# Altium PCB HVpcb.PcbDoc
Units mm, origin at the board's own origin, x right, y up, seen from the top; angles counter-clockwise.
Board outline 63.5 x 34 mm, 2 copper layers (Top Layer, Bottom Layer); 23 components, 14 nets, 62 pads, 0 vias.
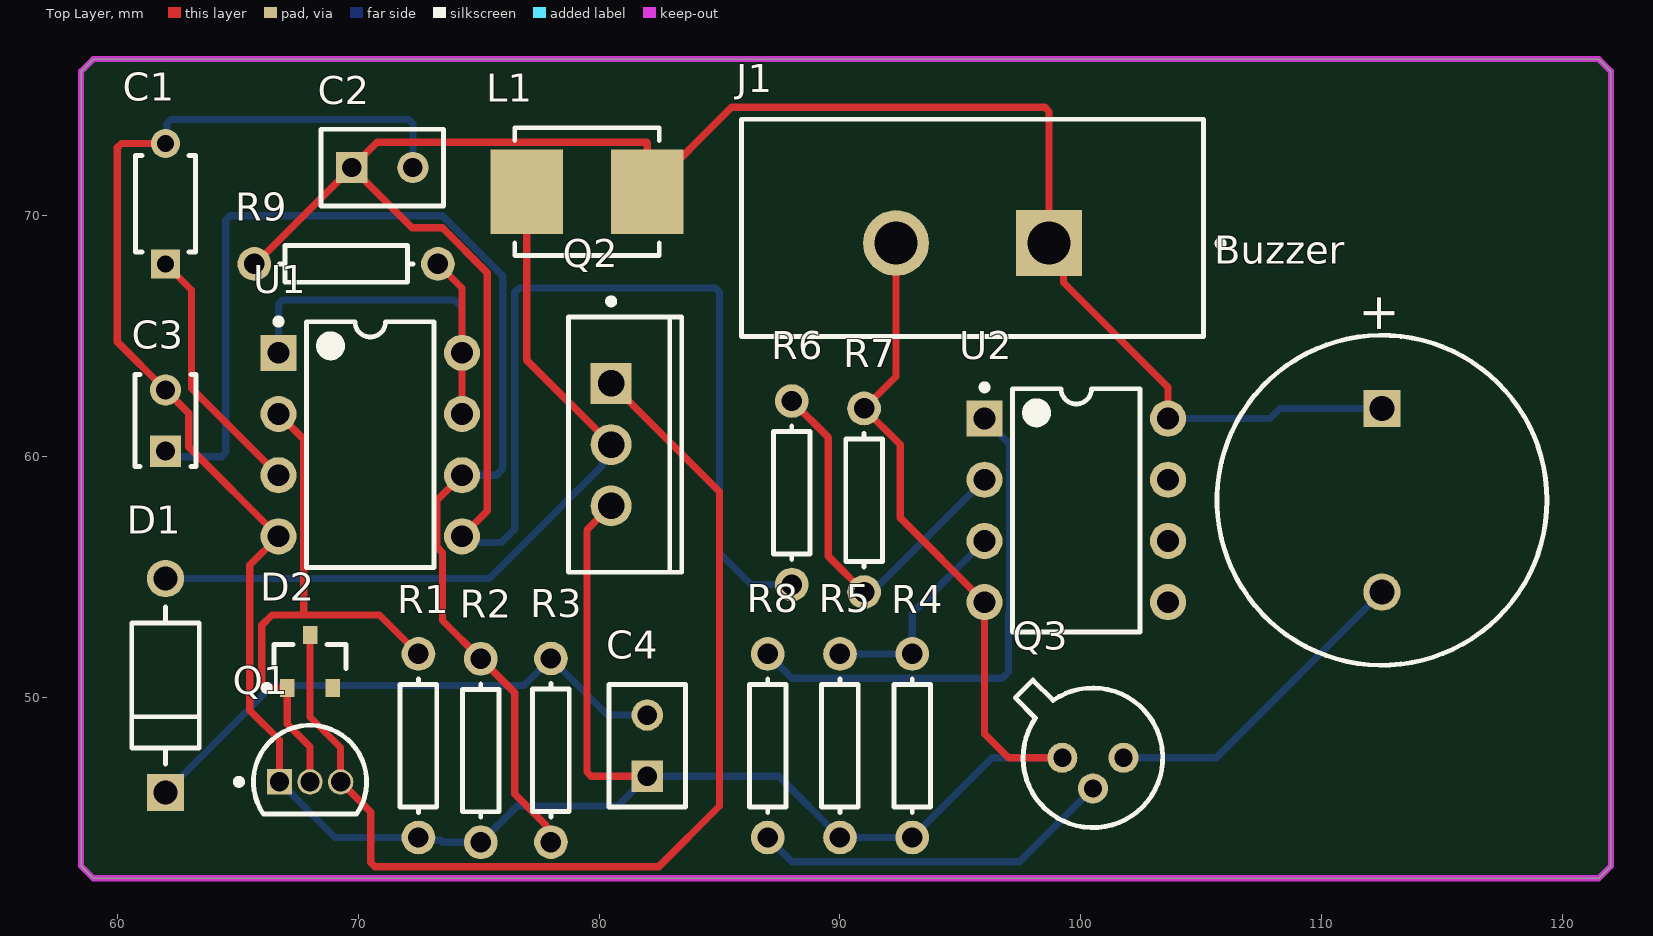
[diagram p0: Top Layer view]
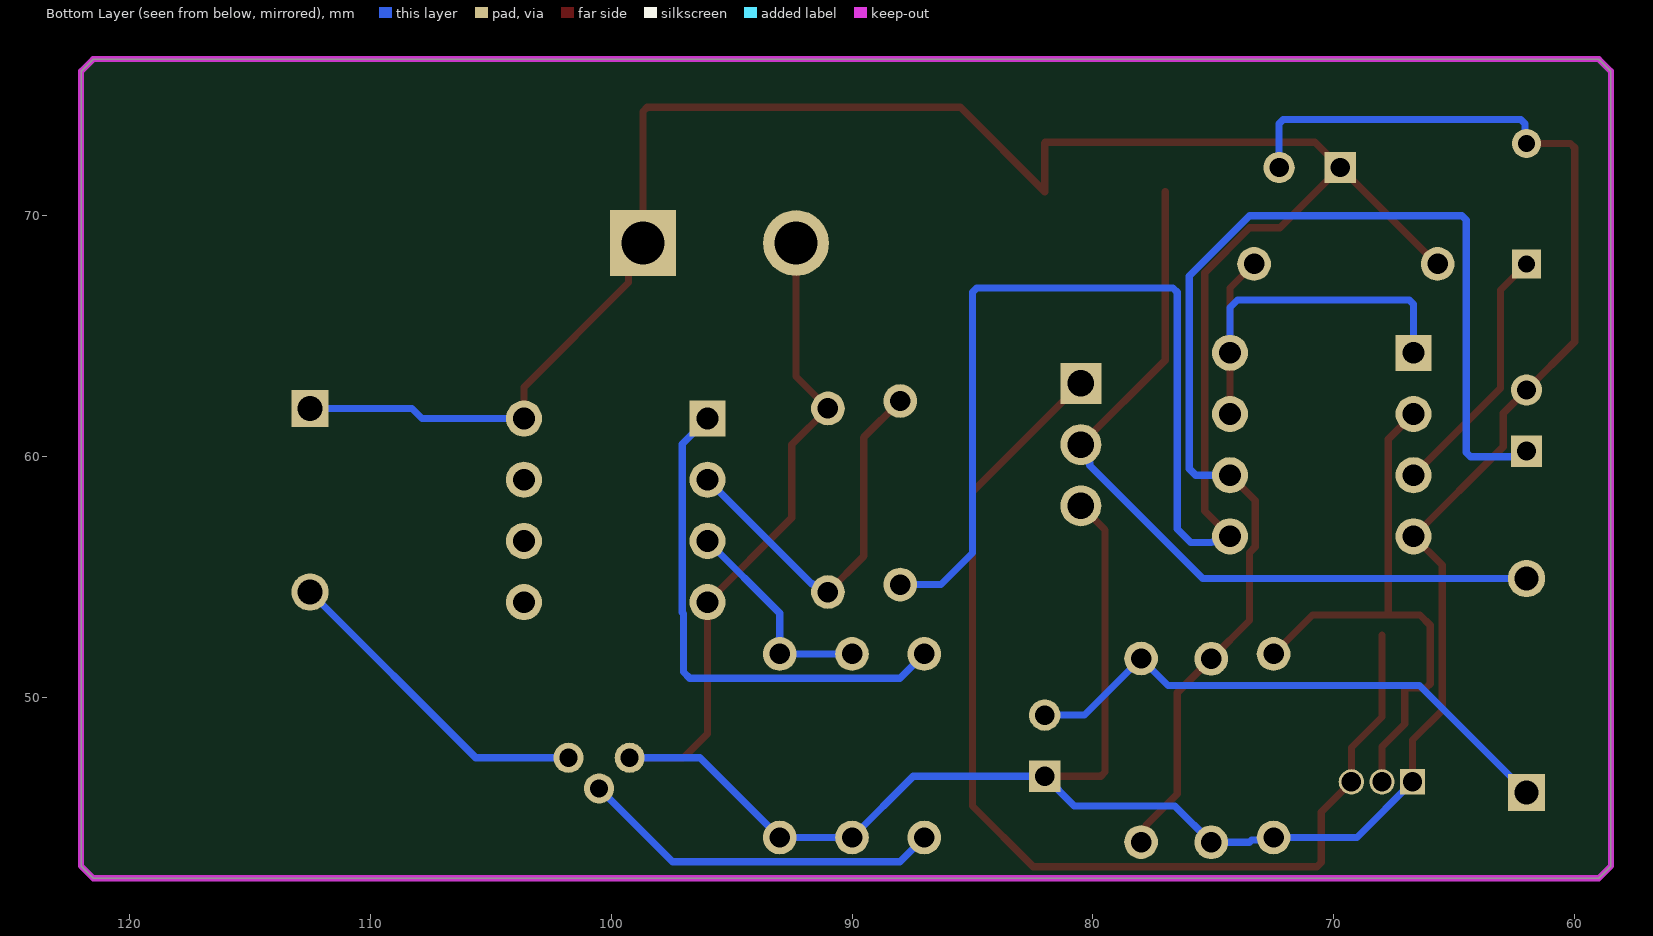
[diagram p1: Bottom Layer view, seen from below]

## Layer stack, top to bottom
Top Solder: solder mask 0.0102, Solder Resist, Dk 3.5
Top Layer: signal copper 0.0356
Dielectric 1: dielectric 0.32, FR-4, Dk 4.8
Bottom Layer: signal copper 0.0356
Bottom Solder: solder mask 0.0102, Solder Resist, Dk 3.5

## Board outline
58.5,43 58.5,76 59,76.5 121.5,76.5 122,76 122,43 121.5,42.5 59,42.5

## Design rules (kind name [scope] priority, off if disabled: settings)
Clearance [All] p1: gap=0.15 ignorepadtopadclearanceinfootprint=FALSE
PolygonConnect [All] p1: connectstyle=Relief reliefconductorwidth=0.254 reliefentries=4 polygonreliefangle="90 Angle" airgapwidth=0.254
RoutingVias [All] p1: holewidth=0.711 width=1.27 viastyle="Through Hole" minholewidth=0.711 minwidth=1.27 maxholewidth=0.711 maxwidth=1.27
SolderMaskExpansion [All] p1: expansion=0.102 istentingtop=FALSE
Width [All] p1: maxlimit=2 minlimit=0.15 preferedwidth=0.3
30 further rules are at their usual default settings.

## Components (designator, comment, footprint, x,y, rotation, side; value= is the part's Value field where it differs from the comment)
Buzzer "KPEG242" KINGS-KPEG242-2 112.5,58.19 r270 top
C1 "22nF" FP-RCE1K1-2_5-MFG 62,70.5 r90 top
C2 "0.1uF" CAPR51-254-508X318X736 71,72 r0 top
C3 "0.01uF" KEMT-C315-THT-2 62,61.5 r90 top
C4 "0.1uF" CAPR51-254-508X318X736 82,48 r90 top
D1 "1N4007" FP-1N4007-MFG 62,50.5 r90 top value=15pF
D2 "BAS40-04" INF-SOT23_L 68,51.5 r90 top
J1 "Batareika" FP-350428-1-MFG 95.5,69.5 r180 top
L1 "10mH" FP-LQH55DN_03-MFG 79.5,71 r180 top
Q1 "BC516" ONSC-TO-92-3-29-11 68,46.5 r0 top
Q2 "IRF840" VISH-TO-220AB-3 80.5,60.5 r0 top
Q3 "2N2222A" STM-TO-18-3 100.5,47.5 r0 top
R1 "Res1" AXIAL-0.3 72.5,48 r90 top value=10K
R2 "Res1" AXIAL-0.3 75.088,47.799 r90 top value=30.1K
R3 "Res1" AXIAL-0.3 78,47.81 r90 top value=10M
R4 "Res1" AXIAL-0.3 93,48 r90 top value=1K
R5 "Res1" AXIAL-0.3 90,48 r90 top value=40K
R6 "Res1" AXIAL-0.3 88,58.5 r90 top value=2K
R7 "Res1" AXIAL-0.3 91,58.19 r90 top value=1K
R8 "Res1" AXIAL-0.3 87,48 r270 top value=10K
R9 "Res1" AXIAL-0.3 69.5,68 r0 top value=22.1
U1 "MC34063AP" P0008A 70.5,60.5 r0 top
U2 "LM358N" ONSC-PDIP-8-626-05_M 99.81,57.77 r0 top

## Footprints (in the part's own frame and the unit in brackets; to place one, negate y for a bottom-side part, rotate by r counter-clockwise, add the part's x,y. Pads: shape width x height; smd on the part's side, far side on the other; paste and mask are expansions set on the pad)
AXIAL-0.3 [mm] "Axial Device, Thru-Hole; 2 Leads; 0.3 in Pin Spacing"
  round 1.4 hole 0.85: 1(-3.81,0) 2(3.81,0)
  silkscreen extent -2.77,-0.76 2.77,0.76
CAPR51-254-508X318X736 [mm] "THD, 2-Leads, Body 5.08x3.18mm"
  rect 1.3x1.3 hole 0.8: 1(-1.27,0)
  round 1.3 hole 0.8: 2(1.27,0)
  silkscreen extent -2.54,-1.59 2.54,1.59, body extent -2.54,-1.59 2.54,1.59, height 7.36
FP-1N4007-MFG [mm]
  rect 1.55x1.55 hole 1 paste-1000 mask+0: 1(-4.44,0)
  round 1.55 hole 1 paste-1000 mask+0: 2(4.44,0)
  silkscreen extent -3.26,-1.4 3.26,1.4, body extent -5.32,-1.5 5.32,1.5, height 0.25
FP-350428-1-MFG [mm]
  rect 2.73x2.73 hole 1.78 paste-1000 mask+0: 1(-3.175,0.635)
  round 2.73 hole 1.78 paste-1000 mask+0: 2(3.175,0.635)
  silkscreen extent -10.43,-4.51 9.59,4.51, body extent -9.69,-4.61 9.69,4.61, height 0.25
FP-LQH55DN_03-MFG [mm]
  rect 3x3.5 smd paste+0 mask+0: 1(-2.5,0) 2(2.5,0)
  silkscreen extent -3,-2.65 3,2.65, body extent -4.1,-2.75 4.1,2.75, height 0.25
FP-RCE1K1-2_5-MFG [mm]
  rect 1.2x1.2 hole 0.7 paste-1000 mask+0: 1(-2.5,0)
  round 1.2 hole 0.7 paste-1000 mask+0: 2(2.5,0)
  silkscreen extent -2,-1.25 2,1.25, body extent -3.2,-1.35 3.2,1.35, height 0.25
INF-SOT23_L [mm] "SOT23, 3-Leads, Body 2.9x1.3 mm, Pitch 0.95 mm, IPC High Density"
  rect 0.75x0.6 smd: 1(-1.1,0.95) 2(-1.1,-0.95) 3(1.1,0)
  silkscreen extent -1.22,-1.5 0.7,1.92, body extent -0.7,-1.5 0.7,1.5, height 1.1
KEMT-C315-THT-2 [mm] "THD, 2-Leads, Body 3.81x2.54mm"
  rect 1.3x1.3 hole 0.8: 1(-1.27,0)
  round 1.3 hole 0.8: 2(1.27,0)
  silkscreen extent -1.9,-1.27 1.91,1.27, body extent -1.91,-1.27 1.91,1.27, height 4.66
KINGS-KPEG242-2 [mm] "THD, 2-Leads, Dia 13.7mm, Pitch 7.62mm"
  rect 1.55x1.55 hole 1.05: 1(-3.81,0)
  round 1.55 hole 1.05: 2(3.81,0)
  silkscreen extent -6.85,-6.85 6.85,6.85, body extent -6.85,-6.85 6.85,6.85, height 7.6
ONSC-PDIP-8-626-05_M [mm] "DIP, 8-Leads, Body 10x7.1mm, Pitch 2.54mm"
  rect 1.5x1.5 hole 0.9: 1(-3.81,3.81)
  round 1.5 hole 0.9: 2(-3.81,1.27) 3(-3.81,-1.27) 4(-3.81,-3.81) 5(3.81,-3.81) 6(3.81,-1.27) 7(3.81,1.27) 8(3.81,3.81)
  silkscreen extent -3.93,-5.05 2.65,5.23, body extent -3.95,-5 3.95,5, height 5.33
ONSC-TO-92-3-29-11 [mm] "TO, 3-Leads, Body Dia 4.7mm, Pitch 1.27mm"
  rect 1.05x1.05 hole 0.8: 1(-1.27,0)
  round 1.05 hole 0.8: 2(0,0) 3(1.27,0)
  silkscreen extent -3.07,-1.34 2.35,2.35, body extent -2.35,-1.33 2.36,2.36, height 7.87
P0008A [mm] "DIP, 8-Leads, Body 10.15x6.6mm, Pitch 2.54mm"
  rect 1.5x1.5 hole 0.9: 1(-3.81,3.81)
  round 1.5 hole 0.9: 2(-3.81,1.27) 3(-3.81,-1.27) 4(-3.81,-3.81) 5(3.81,-3.81) 6(3.81,-1.27) 7(3.81,1.27) 8(3.81,3.81)
  silkscreen extent -3.93,-5.1 2.65,5.23, body extent -3.95,-5.07 3.95,5.07, height 5.08
STM-TO-18-3 [mm] "TO, 3-Leads, Diameter 5.8mm"
  round 1.25 hole 0.75: 1(0,-1.27) 2(1.27,0) 3(-1.27,0)
  silkscreen extent -3.23,-2.9 2.9,3.23, body extent -3.23,-2.9 2.9,3.23, height 5.3
VISH-TO-220AB-3 [mm] "FM, 3-Leads, Body 10.55x4.65mm, Pitch 2.54mm"
  rect 1.7x1.7 hole 1.1: 1(0,2.54)
  round 1.7 hole 1.1: 2(0,0) 3(0,-2.54)
  silkscreen extent -1.76,-5.3 2.93,6.07, body extent -1.74,-5.28 2.91,5.28, height 19.31

## Part data
Buzzer: library part CMP-2000-06518-1, "Piezo Indicator, 4100 Hz, 3 to 16 V, -20 to 70 degC, 2-Pin THD, RoHS", Current - Max=7A, Frequency Range=3600to4600Hz, Manufacturer=KingstateElectronicsCorp., Maximum Resonant Frequency=4600Hz, Maximum Supply Current=7mA, Operating Temperature=-20to70°C, Package Description="2-Pin Through Hole Device, Body Dia 13.7 mm, Pitch 7.62 mm", PartNumber=KPE-242, Typical Operating Supply Voltage=12Vdc, Category=AudioIndicatorsandAlerts, Datasheet URL=https://datasheet.ciiva.com/11776/0900766b8068f3a2-11776713.pdf, Datasheet Version=01/2006, Manufacturer URL=http://www.kingstate.com.tw/index.php/en/, Minimum Sound Pressure=70dBA, Mounting=ThroughHole, Mounting Technology=ThroughHole, Package Reference=KPEG242, Product Diameter=13.7mm, Product Height=7.6mm, Technology=Piezo, Termination Method=Pin, Tone Mode=Continuous, Type=Indicator
C1: library part CMP-06035-035148-1, "Cap Ceramic Monolithic 22nF 50V 5% Thru-Hole Bulk", Case/Package=Radial, Dielectric=C0G, Max Operating Temperature=125°C, Min Operating Temperature=-55°C, Package Quantity=500, Ratings=AEC-Q200, Resistor Type=Ceramic, Tolerance=5%, Voltage Rating=50V, Capacitance=22nF, Height=3.5mm, Height - Seated (Max)=0.138inch, Lead Diameter=0.5mm, Lead Pitch=0.197inch, Lead/Base Style="Formed Leads", Length=0.157inch, Mount="Through Hole", Packaging=Bulk, Termination=Radial, Voltage Rating (DC)=50V, Width=0.098inch
C2 C4: library part CMP-1664-00004-1, "Radial Leaded Multilayer Ceramic Capacitor, 0.1 uF, +/- 10%, 50 V, -55 to 125 degC, 2-Pin THD, RoHS, Tape and Reel", Case\Package=SOT-23-5, Dropout Voltage="260 mV", Max Input Voltage="8 V", Max Operating Temperature="85 degC", Max Power Dissipation="250 mW", Min Operating Temperature="-40 degC", Output Current="150 mA", Output Voltage="5 V", Package Quantity=3000, ComponentLink1Description="Manufacturer URL", ComponentLink1URL=http://www.kemet.com/, ComponentLink2Description=Datasheet, ComponentLink2URL=http://www.kemet.com/docfinder?Partnumber=C320C104K5R5TA, DatasheetVersion=Dec-15, Height="1.3 mm", Length="3 mm", Mount="Surface Mount", Outputs=1, PackageDescription="2-Pin Through Hole Device, Body 5.08 x 3.18 mm, Pitch 2.54 mm", PackageReference=CAPR51-254-508X318X736, Packaging="Tape and Reel", Pins=5, Radiation Hardening=No, RoHSCompliant=true, Width="1.8 mm"
C3: library part CMP-1664-00007-1, "Capacitor, Ceramic, 0.01 uF, +/- 10%, 100 V, X7R, -55 to 125 degC, 2-Pin THD, RoHS, Bulk", Case\Package=PDIP, Forward Current="60 mA", Forward Voltage="1.5 V", Max Operating Temperature="100 degC", Max Power Dissipation="400 mW", Min Operating Temperature="-55 degC", Output Voltage="70 V", Package Quantity=2000, Channels=2, ComponentLink1Description="Manufacturer URL", ComponentLink1URL=http://www.kemet.com/, ComponentLink2Description=Datasheet, ComponentLink2URL=http://capacitoredge.kemet.com/capedge2/DataSheet/Datasheet-C315C103K1R5TA.pdf?pn=C315C103K1R5TA{BULK}, DatasheetVersion=Aug-16, Mount="Through Hole", Nominal Vf="1.3 V", PackageDescription="2-Pin Through Hole Device, Body 3.81 x 2.54 mm", PackageReference=C315-THT-2, Packaging=Rail/Tube, Pins=16, Radiation Hardening=No, REACH SVHC=Unknown, RoHSCompliant=true, Vce Max="500 mV"
D1: library part CMP-123542-000001-1, "Rectifier diode 1000 V 1 A DO-41, ,", Capacitance=15pF, Forward Current=1A, Manufacturer=Diotec, Max Junction Temp=+175°C, Max Repetitive Reverse Voltage=1000V, Max Surge Forward Current=27A, Peak Reverse Current=5uA, Temperature="-50°C to +175°C", Temperature Range Low=-50°C, Automotive=No, Category=Diode, ComponentLink2Description=Datasheet, ComponentLink2URL=https://datasheet.octopart.com/1N4007-Diotec-datasheet-62346875.pdf, Device Class L1="Discrete Semiconductors", Device Class L2=Diodes, Device Class L3="Rectifier Diodes", Height=2.8mm, Ipc Land Pattern Name=DIOAD888W100L520D280, Lead Free=Yes, Manufacturer Part Number=1N4007, Octopart=https://octopart.com/1n4007-diotec-4040411, Package=1N4007, Reverse Voltage=1000V, RoHS=TRUE, Temperature Range High=+175°C
D2: library part CMP-1182-00024-1, "Silicon Schottky Diode, -55 to 150 degC, SOT23, Reel, Green", Manufacturer=Infineon, ComponentLink1Description="Manufacturer URL", ComponentLink1URL=http://www.infineon.com/, ComponentLink2Description=Datasheet, ComponentLink2URL=http://www.infineon.com/dgdl/bas40_bas140series.pdf?folderId=db3a30431400ef68011425f1ca2505e3&fileId=db3a304314dca389011518a57ed20e11, ComponentLink3Description="Package Specification", ComponentLink3URL=http://www.infineon.com/dgdl/SOT23-Package_Overview.pdf?folderId=db3a30431936bc4b0119532290053c66&fileId=db3a30431936bc4b0119533468123c85, Configuration=Dual, CT (max)="5Â pF", Green=TRUE, IF (max)="120Â mA", Mounting Technology="Surface Mount", PackageDescription="3-Pin Small Outline Transistor Package, 1.3 x 2.9 mm Body, 0.95 mm Pitch", PackageReference=SOT23, PackageVersion=Apr-08, Packing=Reel, PartNumber=BAS40-04, VF (max)="1,000Â mV", VR (max)="40Â V"
J1: library part CMP-03369-000080-1, "CONN HEADER VERT 2POS 6.35MM", Current Rating=12A, Manufacturer="TE Connectivity", Manufacturer Part Number=350428-1, Temperature="-40°C to +105°C", Temperature Range High=+105°C, Temperature Range Low=-40°C, Voltage Rating=600V, Automotive=No, Category=Conn, ComponentLink2Description=Datasheet, ComponentLink2URL=https://www.te.com/commerce/DocumentDelivery/DDEController?Action=showdoc&DocId=Customer+Drawing%7F350428%7FY2%7Fpdf%7FEnglish%7FENG_CD_350428_Y2.pdf%7F350428-1, Conn Gender=Male, Conn Orientation=Vertical, Contact Material=Gold,Nickel, Device Class L1=Connectors, Device Class L2="Headers and Wire Housings", Device Class L3=unset, Digikey Description="CONN HEADER VERT 2POS 6.35MM", Height=14.99mm, Lead Free=Yes, Mouser Description="Connector, Soft Shell; Universal MATE-N-LOK; 2; Nylon; Natural; 19 A; 600 VAC", Number Of Contacts=2, Number Of Rows=1, Octopart=https://octopart.com/350428-1-te+connectivity-46505355, Package=350428-1, Pitch=6.35mm, RoHS=TRUE, Standoff Height=0.63mm
L1: library part CMP-06042-013153-1, "Wire Wound Ferrite Inductor for Power Lines 10000μH ±20% 140Ω  0.05A 2220", Case Code (Imperial)=2220, Case Code (Metric)=5750, Current Rating=50mA, DC Resistance (DCR)=100R, Inductance Tolerance=20%, Max Operating Temperature=80°C, Min Operating Temperature=-25°C, Package Quantity=350, Resistor Type=Wirewound, Self Resonant Frequency=500kHz, Test Frequency=10kHz, Case/Package=2220, Core Material=Ferrite, DC Current=50mA, Depth=5.3mm, Height=4.7mm, Height - Seated (Max)=0.198inch, Inductance=10mH, Length=5.7mm, Max DC Current=50mA, Military Standard=Not, Mount="Surface Mount", Packaging="Tape and Reel", Radiation Hardening=No, REACH SVHC="No SVHC", Series Resistance=100R, Shielding=Unshielded, Termination=SMD/SMT, Tolerance=20%, Weight=0.016932oz, Width=6mm
Q1: library part CMP-1048-01441-1, "Amplifier Transistor, PNP Silicon, 3-Pin TO-92, Pb-Free, Bulk Box", Manufacturer="On Semiconductor", PartNumber=BC557CG, ComponentLink1Description="Manufacturer URL", ComponentLink1URL=http://www.onsemi.com/, ComponentLink2Description=Datasheet, ComponentLink2URL=http://www.onsemi.com/pub_link/Collateral/BC556B-D.PDF, ComponentLink3Description="Package Specification", ComponentLink3URL=http://www.onsemi.cn/pub_link/Collateral/2N6426-D.PDF, DatasheetVersion="Rev. 3", IC Continuous (A)=-0.1, Mounting Technology="Through Hole", PackageDescription="3-Pin Transistor Outline, Body 4.825 x 3.685 mm, Pitch 1.27 mm", PackageReference=TO-92-3-29-11_AM_SL, PackageVersion="Rev. AM", Packing="Bulk Box", Polarity=PNP, RoHS=TRUE
Q2: library part CMP-2000-06467-1, "Power MOSFET, 500 V, -55 to 150 degC, 3-Pin FM, RoHS, Tape and Reel", Manufacturer=Vishay, Maximum Continuous Drain Current=8A, Maximum Drain Source Resistance=0.85Ω, Maximum Drain Source Voltage=500V, Maximum Gate Source Voltage=±20V, Maximum Operating Temperature=+150°C, Maximum Power Dissipation=125W, Minimum Gate Threshold Voltage=2V, Minimum Operating Temperature=-55°C, Package Description="3-Pin Flange Mount, Body 10.275 x 4.45 mm, Pitch 2.54 mm", Package Reference=TO-220AB-3, Package Type=TO-220AB, Typical Input Capacitance @ Vds=1300pF@25V, Category=PowerMOSFET, Channel Mode=Enhancement, Channel Type=N, Datasheet URL=https://datasheet.ciiva.com/26791/irf840pbf-26791500.pdf, Datasheet Version="Rev. C, 03/2011", Dimensions=10.41x4.7x9.01mm, Height=9.01mm, Length=10.41mm, Manufacturer URL=http://www.vishay.com/, Mounting Technology=ThroughHole, Mounting Type=ThroughHole, Number of Elements per Chip=1, Package URL=http://www.vishay.com/docs/71195/to220ab.pdf, Pin Count=3, Typical Gate Charge @ Vgs=63nC@10V, Typical Turn-Off Delay Time=49ns, Typical Turn-On Delay Time=14ns, Width=4.7mm
Q3: library part CMP-2000-05381-1, "High Speed Switch, 0.6 A IC, -65 to 175 degC, 3-Pin TO-18, RoHS, Bulk", Collector Emitter Voltage V(br)ceo=40V, DC Collector Current=600mA, DC Current Gain hFE=300hFE, Manufacturer=STMicroelectronics, Operating Temperature Max=175degC, Package Description="3-Pin Through Hole Device, Dia 5.8 mm, Pitch 1.27 mm", Package Reference=TO-18-3, Power Dissipation Pd=500mW, Transistor Case Style=TO-18, Transition Frequency ft=300MHz, Automotive Qualification Standard=-, Datasheet URL=https://datasheet.ciiva.com/25917/cd00003223-25917094.pdf, Datasheet Version=Feb-03, Manufacturer URL=http://www.st.com/, No. of Pins=3Pins, Product Range=-, Transistor Polarity=NPN
R1 R2 R3 R4 R5 R6 R7 R8 R9: "Resistor", LatestRevisionDate=17-Jul-2002, LatestRevisionNote="Re-released for DXP Platform.", PackageDescription="Axial Device, Thru-Hole; 2 Leads; 0.3 in Pin Spacing", PackageReference=AXIAL-0.3, Published=8-Jun-2000, Publisher="Altium Limited"
U1: library part CMP-0323-00037-3, "Buck Inverting Buck-Boost Regulator with 3 to 40 V Input and 1.55 to 40 V Output, 0 to 70 degC, 8-Pin PDIP (P), Pb-Free (RoHS)", Manufacturer="Texas Instruments", Rating=Catalog, Switch Current Limit(Typ)(A)=1.5, Code_JEDEC=MS-001-BA, ComponentLink1Description=Datasheet, ComponentLink1URL=http://www.ti.com/general/docs/lit/getliterature.tsp?genericPartNumber=MC34063A&fileType=pdf, ComponentLink2Description="Package Specification", ComponentLink2URL=http://www.ti.com/lit/ml/mpdi001b/mpdi001b.pdf, ComponentLink3Description="URL Link1", ComponentLink3URL="Samples URL:http://www.ti.com/product/mc34063a#samples", DatasheetVersion=SLLS636M, Duty Cycle(Max)(%)=90, Eco-Plan="Pb-Free (RoHS)", Iout(Max)(A)=0.75, Iq(Typ)(mA)=4, Mounting Technology="Through Hole", PackageDescription="8-Pin Plastic Dual-In-Line Package, Row Spacing 7.62 mm, Pitch 2.54 mm", PackageReference=P0008A, PackageVersion="revE, Apr-2010", PartNumber=MC34063AP, Regulated Outputs(#)=1, SubFamily="Inverting Regulator", Topology="Buck, Inverting Buck-Boost", Vin(Max)(V)=40, Vin(Min)(V)=3, Vout(Max)(V)=40, Vout(Min)(V)=1.55
U2: library part CMP-1310-00098-1, "Single Supply Dual Operational Amplifier, 3 to 32 V, 0 to 70 degC, 8-Pin PDIP, Tube", Manufacturer="On Semiconductor", ComponentLink1Description="Manufacturer URL", ComponentLink1URL=http://www.onsemi.com/, ComponentLink2Description=Datasheet, ComponentLink2URL=http://www.onsemi.cn/pub_link/Collateral/LM358-D.PDF, ComponentLink3Description="Package Specification", ComponentLink3URL=http://www.onsemi.com/pub_link/Collateral/LM211-D.PDF, DatasheetVersion="Rev. 27", Mounting Technology="Through Hole", PackageDescription="8-Pin Plastic Dual-In Line Package, Body 9.52 x 6.605 mm, Pitch 2.54 mm", PackageReference=PDIP-8-626-05, PackageVersion="Rev. M, 04/2010", Packing=Tube, PartNumber=LM358N, RoHS=FALSE, VCC Max (V)=32, VCC Min (V)=3

## Nets (pads, with @x,y where several pads share a name; then routed paths per layer and width w, separated by ;. In a path a pad name is that pad's centre, name@x,y a point inside that pad or via, vN(x,y) a via of type N, cw(c..) or ccw(c..) an arc to the next point about the centre after c; other vN are vias at no path point)
Amplified: D1.2 L1.2 Q2.2 | length 33
  Top Layer w0.3: L1.2 77,64 Q2.2
  Bottom Layer w0.3: D1.2 75.44,54.94 80.131,59.631 80.131,59.752 80.5,60.121 Q2.2
buz: Buzzer.2 Q3.2 | length 13.6
  Bottom Layer w0.3: Q3.2 105.62,47.5 Buzzer.2
Comp: C3.1 R2.2 R3.1 U1.6 | length 52.4
  Top Layer w0.3: U1.6 73.26,58.18 73.26,56.255 73.5,56.015 73.5,53.197 R2.2 76.5,50.197 76.5,46 77.79,44.71 77.79,44.21 R3.1
  Bottom Layer w0.3: C3.1 62.23,60 64.324,60 64.5,60.176 64.5,69.824 64.676,70 73.5,70 76,67.5 76,59.5 75.73,59.23 U1.6
"Current plus": Buzzer.1 C2.1 J1.1 L1.1 R6.1 R9.1 U1.5 U2.8 | length 116.7
  Top Layer w0.3: R9.1 65.73,68 C2.1 ; U1.5 75.362,57.742 75.362,67.638 73.5,69.5 72.23,69.5 C2.1 ; U2.8 103.62,62.88 99.274,67.226 99.274,68.266 J1.1 98.675,74.324 98.499,74.5 85.5,74.5 L1.1 82,73.025 81.975,73.05 70.78,73.05 C2.1
  Bottom Layer w0.3: U1.5 74.54,56.46 75.06,56.46 75.086,56.434 75.934,56.434 76.5,57 76.5,66.824 76.676,67 84.824,67 85,66.824 85,56 86.31,54.69 R6.1 ; U2.8 107.848,61.58 108.268,62 Buzzer.1
Final: C4.2 D1.1 R3.2 | length 23.3
  Bottom Layer w0.3: D1.1 66.44,50.5 76.88,50.5 R3.2 80.35,49.27 C4.2
GND: C1.2 C2.2 C3.2 C4.1 J1.2 Q1.1 Q2.3 Q3.3 R1.1 R2.1 R4.1 R5.1 R7.2 U1.4 U2.4 | length 123
  Top Layer w0.3: C1.2 60.176,73 60,72.824 60,64.77 C3.2 62.967,61.803 62.967,60.413 U1.4 65.5,55.5 65.5,49.465 66.73,48.235 Q1.1 ; Q2.3 79.5,56.96 79.5,46.906 79.676,46.73 C4.1 ; J1.2 92.325,63.325 R7.2 92.5,60.5 92.5,57.46 U2.4 96,48.5 97,47.5 Q3.3
  Bottom Layer w0.3: C1.2 62.061,73.061 62.061,73.824 62.236,74 72.094,74 72.27,73.824 C2.2 ; Q1.1 69.04,44.19 R1.1 72.608,44.082 73.418,44.082 73.511,43.989 R2.1 76.599,45.5 80.77,45.5 C4.1 87.46,46.73 R5.1 R4.1 96.31,47.5 Q3.3
minus: R6.2 R7.1 U2.2 | length 16.1
  Top Layer w0.3: R6.2 89.51,60.8 89.51,55.87 R7.1
  Bottom Layer w0.3: R7.1 91.298,54.38 91.641,54.723 91.683,54.723 U2.2
NetD2_3: D2.3 Q1.3 Q2.1 | length 45.5
  Top Layer w0.3: D2.3 68,49.196 69.27,47.926 Q1.3 70.523,45.247 70.523,43.153 70.699,42.977 82.477,42.977 85,45.5 85,58.54 Q2.1
NetQ3_1: Q3.1 R8.2 | length 15.2
  Bottom Layer w0.3: R8.2 88.01,43.18 97.45,43.18 Q3.1
"Out Pulses": R8.1 U2.1 | length 21.5
  Bottom Layer w0.3: R8.1 88.01,50.8 96.736,50.8 97,51.064 97,53.475 97.05,53.525 97.05,60.53 U2.1
plus: R4.2 R5.2 U2.3 | length 8.9
  Bottom Layer w0.3: R5.2 R4.2 93,53.5 U2.3
SWC: R9.2 U1.1 U1.7 U1.8 | length 18.4
  Top Layer w0.3: R9.2 74.31,67 U1.7
  Bottom Layer w0.3: U1.1 66.69,66.324 66.866,66.5 74,66.5 74.31,66.19 U1.8
SWE: D2.1 Q1.2 R1.2 U1.2 | length 24
  Top Layer w0.3: U1.2 67.742,60.718 67.742,53.423 ; Q1.2 68,47.955 67.05,48.905 D2.1 66.176,50.4 66,50.576 66,53 66.423,53.423 67.742,53.423 ; R1.2 70.887,53.423 67.742,53.423
"Timing Cap": C1.1 U1.3 | length 10.7
  Top Layer w0.3: C1.1 63.084,66.916 63.084,62.836 U1.3
pads on no net: D2.2 U2.5 U2.6 U2.7

## Keep-outs
Keep-Out Layer:
  the board outline again, w0.254

## Text inside footprints (layer, text, board x,y; h text height)
Buzzer: Top Overlay "+" at 111.738,66.826 h1.52 r270